# Altium PCB DAQ_Doc.PcbDoc (part 2 of 2)
Units mm, origin at the board's own origin, x right, y up, seen from the top; angles counter-clockwise.
Board outline 100.4 x 106.42 mm, 4 copper layers (Top Layer, Int1 (GND), Int2 (GND), Bottom Layer), stack 1.57 mm thick; 103 components, 79 nets, 453 pads, 246 vias.
Unrouted connection lines stored in the file: 5.
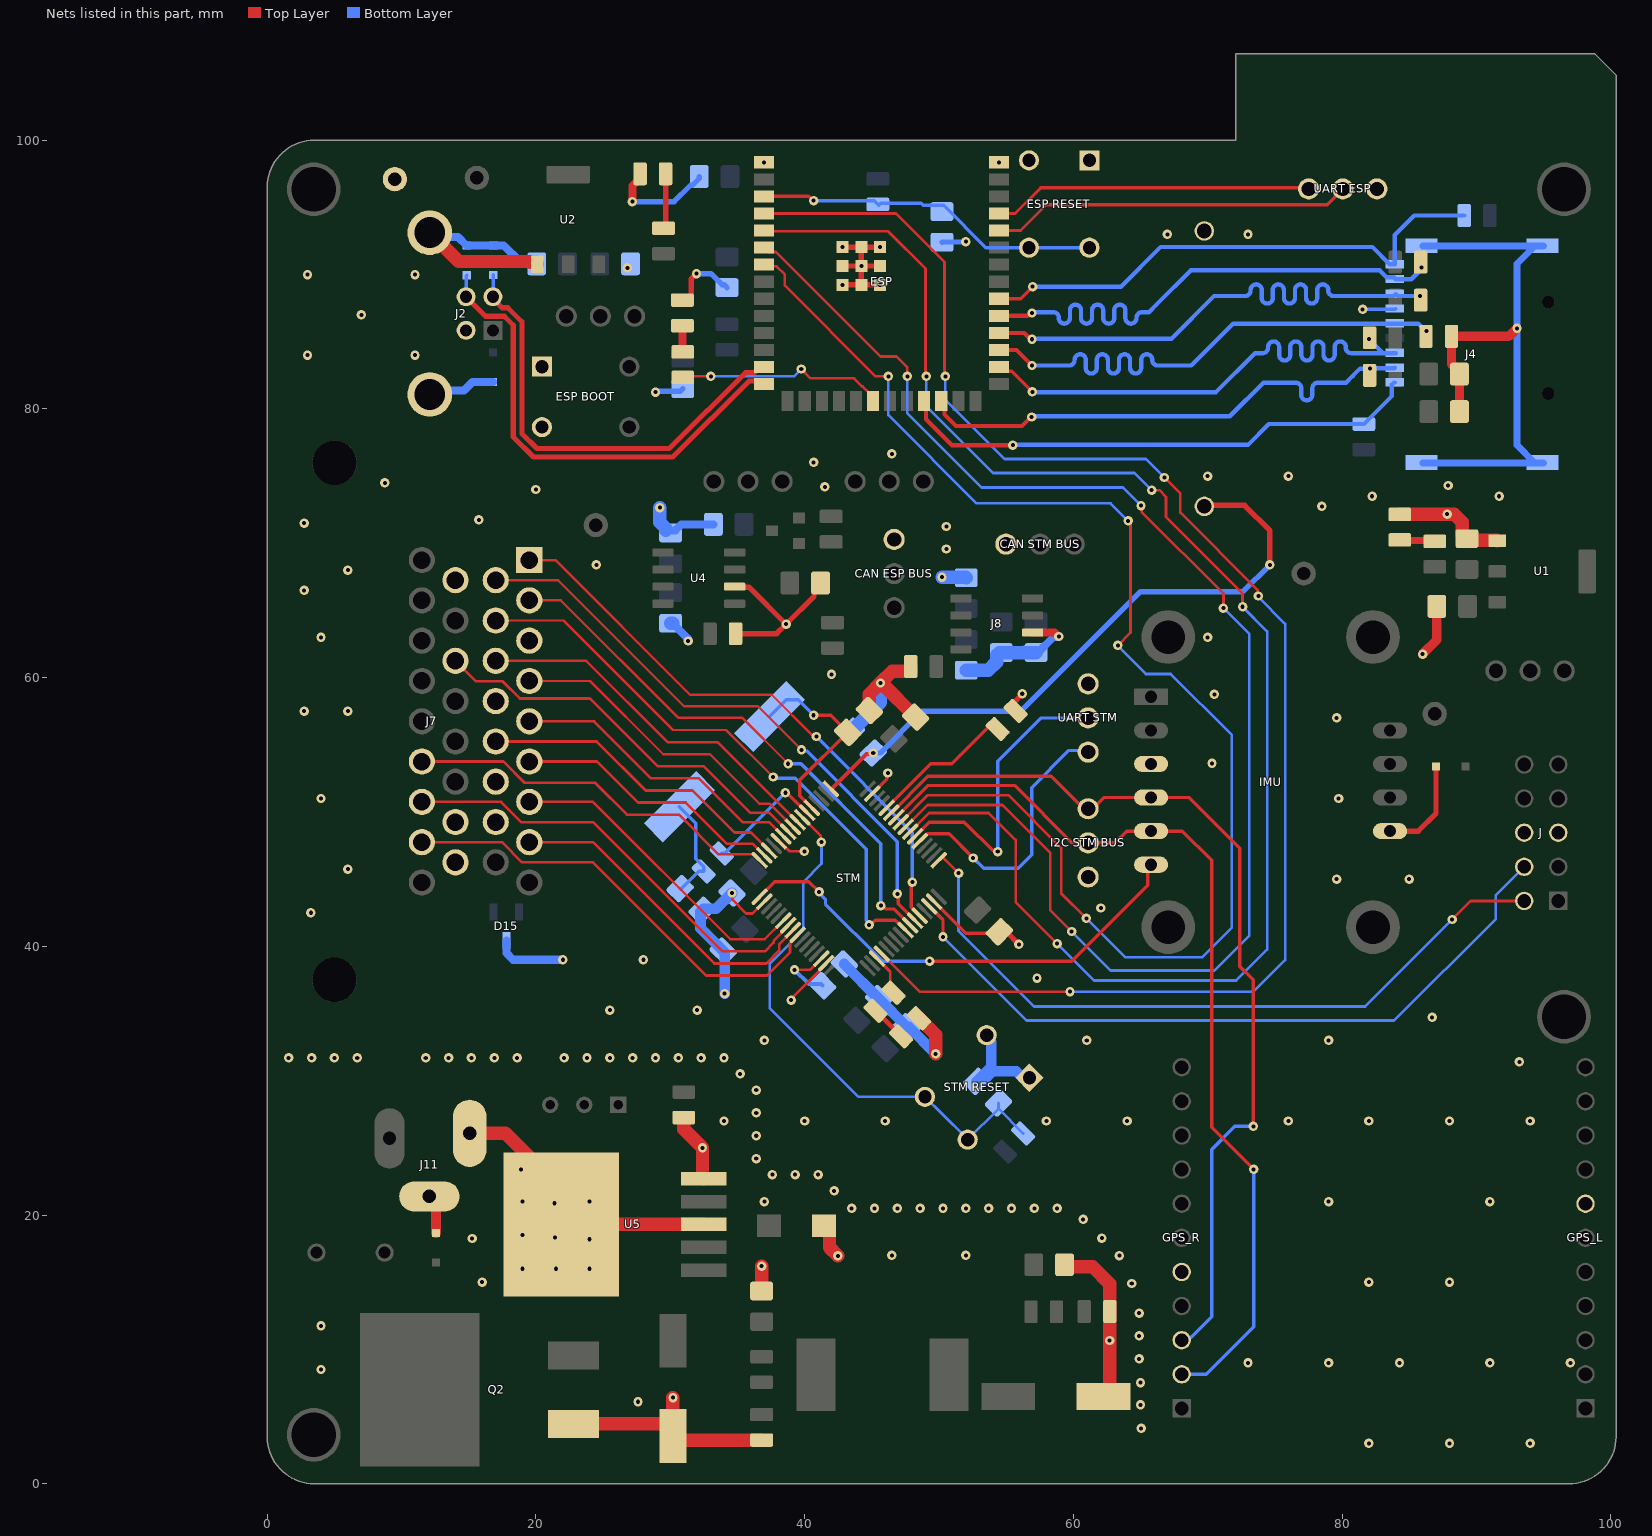
[diagram p4: the nets of this part, all layers, seen from the top]

## Via types
v1: diameter 0.7, hole 0.3, Top Layer to Bottom Layer, 244 vias
v2: diameter 1.27, hole 0.711, Top Layer to Bottom Layer, 2 vias

## Nets (pads, with @x,y where several pads share a name; then routed paths per layer and width w, separated by ;. In a path a pad name is that pad's centre, name@x,y a point inside that pad or via, vN(x,y) a via of type N, cw(c..) or ccw(c..) an arc to the next point about the centre after c; other vN are vias at no path point) (continued)
ESP_Diode_PWR_K: D2.K R2.1 | length 4.1
  Top Layer w0.25: D2.K@29.5,93.45 D2.K@29.65,93.6
  Top Layer w0.4: D2.K@29.65,93.6 R2.1@29.65,97.5
ESP_LED_RES: D8.K R13.1 | length 2
  Top Layer w0.6: R13.1@30.9,86.2 30.913,86.188 30.913,84.263 D8.K@30.925,84.25
ESP_LED_TEST: D8.A ESP.20 | length 15.2
  Top Layer w0.2: D8.A@30.925,82.35 31,82.425 v1(33.025,82.425) ; v1(39.75,82.975) 40.45,82.275 43.677,82.275 44.282,81.669 44.321,81.669 44.81,81.18 ESP.20@45.09,81.18
  Bottom Layer w0.2: v1(33.025,82.425) 39.2,82.425 v1(39.75,82.975)
ESP_RESET: "ESP RESET.3" "ESP RESET.4" C17.1 ESP.3 R8.1 | length 25.9
  Top Layer w0.25: ESP.3@36.975,95.82 40.304,95.82 40.624,95.5 v1(40.675,95.5)
  Bottom Layer w0.25: v1(40.675,95.5) 45.182,95.5 45.525,95.157 45.668,95.3 48.675,95.3 48.818,95.157 50.343,95.157 53.5,92 56.7,92 61.2,92
ESP_UART_RX: "UART ESP.2" ESP.36 | length 27.4
  Top Layer w0.2: ESP.36@53.956,93.28 ESP.36@54.475,93.28 56.08,93.28 58.005,95.205
  Top Layer w0.254: 58.005,95.205 78.89,95.205 80.06,96.375
ESP_UART_TX: "UART ESP.1" ESP.37 | length 24.3
  Top Layer w0.2: ESP.37@54.063,94.55 ESP.37@54.475,94.55 55.675,94.55 57.575,96.45
  Top Layer w0.254: 57.575,96.45 77.445,96.45 77.52,96.375
ESP_USB_D_N: D5.2 ESP.13 J2.2 | length 34
  Top Layer w0.381: J2.2@16.8,88.35 16.8,88.202 17.47,87.532 17.909,87.532 18.95,86.491 18.95,78.175 20.075,77.05 29.917,77.05 32.749,79.882 32.782,79.882 34.754,81.854 35.614,82.714 36.269,82.714 36.675,83.12 ESP.13@36.975,83.12
  Bottom Layer w0.25: J2.2@16.8,88.35 16.813,88.363 16.813,89.962 D5.2@16.825,89.975
ESP_USB_D_P: D6.2 ESP.14 J2.3 | length 36.4
  Top Layer w0.381: J2.3@14.8,88.35 16.253,86.897 17.646,86.897 18.315,86.228 18.315,77.912 19.812,76.415 30.18,76.415 33.012,79.247 33.045,79.247 35.389,81.59 35.877,82.079 36.415,82.079 36.715,81.779 36.715,81.59 ESP.14@36.975,81.85
  Bottom Layer w0.25: J2.3@14.8,88.35 14.825,88.375 14.825,89.925 D6.2@14.85,89.95
GND: "CAN ESP BUS.3" "CAN STM BUS.3" "ESP BOOT.1" "ESP BOOT.2" "ESP RESET.1" "ESP RESET.2" "I2C STM BUS.3" "STM RESET.1" "STM RESET.2" "UART ESP.3" "UART STM.3" C1.1 C2.1 C3.1 C4.1 C6.1 C7.1 C8.1 C9.1 C10.1 C11.1 C12.1 C13.2 C14.2 C15.2 C16.2 C17.2 C18.2 C19.1 C20.1 C21.1 C22.1 C23.1 C24.1 C25.1 C26.1 C27.1 C28.1 C29.1 C30.2 C31.2 C32.1 C33.1 C34.1 COIN.2 D3.1 D4.1 D5.1 D6.1 D9.1 D10.A D11.K D14.K D15.3 ESP.1 ESP.40 ESP.41_1 ESP.41_2 ESP.41_3 ESP.41_4 ESP.41_5 ESP.41_6 ESP.41_7 ESP.41_8 ESP.41_9 GPS_L.07 GPS_R.05 IMU.3 IMU.7 J2.4 J2.S1 J2.S2 J4.P6 J4.SH1 J4.SH2 J4.SH3 J4.SH4 J7.3 J7.13 J7.15 J7.16 J7.18 J7.24 J7.25 J8.2 J11.1 J11.3 J.5 J.6 pad.8 Q2.1 R1.1 R2.2 R3.2 R5.1 R6.1 R13.2 R15.2 R22.1 R23.1 STM.12 STM.18 STM.31 STM.47 STM.63 U1.1 U2.1 U4.2 U5.3 U5.5 U5.6 | length 288.5
  Top Layer w0.2: v1(34.592,43.972) 34.62,43.944 34.62,43.48 35.65,42.45 36.123,42.45 STM.18@37.006,43.333 ; STM.12@38.066,47.83 38.123,47.83 38.878,47.075 v1(39.975,47.075) ; v1(39,36) 39,36.078 41.602,38.68 STM.31@41.602,38.737
  Top Layer w0.25: STM.63@45.038,51.365 46.114,52.441 46.114,52.814 v1(46.2,52.9) ; STM.47@49.634,43.333 51.99,40.977 54.385,40.977 C10.1@54.491,41.084
  Top Layer w0.4: R13.2@30.9,88.1 31.25,88.1 31.55,88.4 31.55,89.669 v1(31.954,90.073) ; U4.2@34.795,66.77 34.825,66.74 35.86,66.74 v1(38.625,63.975) ; R3.2@34.86,63.27 37.92,63.27 v1(38.625,63.975) ; C21.1@41.186,67.05 40.695,66.559 40.695,66.045 v1(38.625,63.975) ; v1(42.825,89.24) ESP.41_5@44.225,89.24 ; ESP.41_2@42.825,90.64 v1(44.225,90.64) ; v1(42.825,92.04) ESP.41_8@44.225,92.04 ; v1(45.625,89.24) ESP.41_5@44.225,89.24 ; ESP.41_3@45.625,90.64 v1(44.225,90.64) ; v1(45.625,92.04) ESP.41_8@44.225,92.04 ; C10.1@54.491,41.084 55.016,41.084 v1(55.95,40.15) ; R5.1@55.713,57.523 55.542,57.694 55.542,58.118 56.2,58.776 v1(56.2,58.8) ; IMU.7@83.575,48.575 85.675,48.575 87,49.9 D3.1@87,53.4 ; ESP.41_5@44.225,89.24 v1(44.225,90.64) ; v1(44.225,90.64) ESP.41_8@44.225,92.04
  Top Layer w0.6: v1(27.175,95.425) 27.175,96.599 27.526,96.95 27.55,96.95 27.75,97.15 R2.2@27.75,97.5 ; J8.2@56.97,63.358 58.596,63.358 58.895,63.059 v1(58.922,63.059)
  Top Layer w0.7: v1(86,61.75) 87.057,62.807 C1.1@87.057,65.3 ; C25.1@88.743,79.8 C24.1@88.743,82.6 88.743,82.75 88.15,83.343 R22.1@88.15,85.4 92.425,85.4 v1(93.025,86)
  Top Layer w0.75: J11.3@12.069,21.381 12.575,20.875 D9.1@12.575,18.675
  Top Layer w1: J2.S1@12.1,93.12 14.245,90.975 19.524,90.975 19.589,90.91 20.075,90.91 20.075,90.79 U2.1@20.11,90.755 ; J11.1@15.069,26.081 17.733,26.081 21.9,21.914 U5.6@21.9,19.3 U5.3@32.5,19.3 ; Q2.1@22.785,4.46 29.325,4.46 C30.2@30.2,3.585 ; v1(30.2,6.4) C30.2@30.2,3.585 ; R23.1@31,27.25 31,26.4 v1(32.4,25) 32.4,22.8 U5.5@32.5,22.7 ; D14.K@36.8,3.25 30.5,3.25 C30.2@30.2,3.55 ; C33.1@36.8,14.343 v1(36.8,16.2) ; D10.A@41.45,19.2 41.5,19.2 41.85,18.85 41.85,17.58 v1(42.47,16.96) ; C15.2@44.818,57.548 44.712,57.654 44.712,57.937 44.818,58.043 44.818,58.768 v1(45.65,59.6) ; R15.2@47.9,60.825 47.9,60.475 46.525,60.475 v1(45.65,59.6) ; C7.1@48.26,57.06 45.72,59.6 v1(45.65,59.6) ; R6.1@48.522,34.647 49.75,33.419 v1(49.75,32) ; C32.1@59.343,16.3 59.493,16.15 61.44,16.15 62.72,14.87 D11.K@62.72,12.82 62.71,12.81 62.71,6.96 C31.2@62.25,6.5 ; R1.1@84.3,72.15 88.367,72.15 88.952,71.564 88.952,70.543 89.152,70.343 C2.1@89.3,70.343 ; C2.1@89.268,70.225 91.52,70.225 U1.1@91.555,70.19 ; C30.2@30.2,3.55 C30.2@30.2,3.585 ; C30.2@30.2,3.55 C30.2@30.2,3.585
  Bottom Layer w0.25: v1@81.5,87.375 v1(81.538,87.412) 83.963,87.412 J4.P6@84,87.45
  Bottom Layer w0.4: v1(27.175,95.425) 30.282,95.425 31.507,96.65 31.657,96.65 32.157,97.15 C13.2@32.157,97.3 ; v1(28.9,81.25) 28.957,81.307 30.732,81.307 C18.2@30.925,81.5 ; v1(31.954,90.073) 33.034,90.073 33.875,89.232 34.025,89.232 C14.2@34.225,89.032 ; C17.2@50.225,92.407 50.247,92.429 51.979,92.429 v1(52,92.45)
  Bottom Layer w0.5: J4.SH3@86,75.98 J4.SH4@94.35,75.98 ; J4.SH2@86,92.13 J4.SH1@94.35,92.13 ; J4.SH4@95,75.98 J4.SH4@94.35,75.98 ; J4.SH1@95,92.13 J4.SH1@94.35,92.13 ; J4.SH4@94.35,75.98 93.025,77.305 v1(93.025,86) 93.025,90.805 J4.SH1@94.35,92.13
  Bottom Layer w0.6: J2.S2@12.1,81.08 12.401,81.381 14.658,81.381 15.277,82 D4.1@16.8,82 ; J2.S1@12.1,93.12 12.419,92.801 14.199,92.801 D6.1@14.85,92.15 14.875,92.175 17.6,92.175 18.808,90.967 19.89,90.967 C4.1@20.057,90.8 ; D15.3@17.8,40.445 17.8,39.5 18.3,39 v1(22,39) ; C27.1@29.675,70.966 30.375,70.966 30.819,71.41 C20.1@33.207,71.41 ; C26.1@30.175,64.044 31.306,62.913 31.306,62.744 v1(31.325,62.725) ; C22.1@57.225,61.87 57.375,61.87 58.545,63.04 58.903,63.04 v1(58.922,63.059)
  Bottom Layer w0.8: C16.2@32.358,42.682 32.252,42.576 32.252,41.341 34.048,39.546 34.048,36.477 v1(34.05,36.475) ; C16.2@32.464,42.788 33.408,42.788 v1(34.592,43.972) ; C12.1@42.958,38.683 42.958,38.671 45.508,36.121 C6.1@45.508,36.108 C11.1@47.608,34.008 47.742,34.008 v1(49.75,32) ; 53.553,33.39 53.553,33.201 53.9,32.854 53.9,31.04 C19.1@52.815,29.955 53.24,29.955 53.984,30.7 55.749,30.7 56.241,30.208 56.735,30.208
  Bottom Layer w1: v1(29.225,72.65) 29.225,71.566 29.675,71.116 C27.1@29.675,70.966 ; C26.1@30.025,64.044 C26.1@30.175,64.044 ; C34.1@43.492,56.008 45.65,58.166 v1(45.65,59.6) ; v1(50.225,67.475) 51.986,67.475 C29.1@52.025,67.436 ; C28.1@52.025,60.55 53.675,60.55 54.285,61.16 54.285,61.66 54.485,61.86 C23.1@54.635,61.86 ; C23.1@54.64,61.865 57.22,61.865 C22.1@57.225,61.87
  other v1: 82,3 88,3 94,3 65.05,4.125 65,5.875 27.6,6.1 65,7.525 4,8.5 73,9 79,9 84.278,9 91,9 97,9 64.9,9.3 62.71,10.66 64.9,11 4,11.75 64.9,12.7 64.35,14.9 16,15 82,15 88,15 19,16 21.5,16 24,16 63.425,16.975 46.5,17 52,17 24,18.196 15.25,18.25 62.125,18.275 21.406,18.313 19,18.5 60.725,19.675 43.5,20.5 45.2,20.5 46.9,20.5 48.6,20.5 50.3,20.5 52,20.5 53.7,20.5 55.4,20.5 57.1,20.5 58.8,20.5 21.376,20.876 19,21 24,21 37,21 79,21 91,21 42.2,21.8 37.6,23 39.3,23 41,23 18.876,23.376 36.4,24.2 36.4,25.9 34,27 40,27 46,27 58,27 64,27 76,27 82,27 88,27 94,27 36.4,27.6 36.4,29.3 35.2,30.5 93.2,31.4 1.6,31.7 3.3,31.7 5,31.7 6.7,31.7 11.8,31.7 13.5,31.7 15.2,31.7 16.9,31.7 18.6,31.7 22.1,31.7 23.8,31.7 25.5,31.7 27.2,31.7 28.9,31.7 30.6,31.7 32.3,31.7 34,31.7 37,33 61,33 79,33 86.709,34.709 25.5,35.25 32,35.25 57.3,37.625 28,39 3.25,42.5 62.05,42.85 79.602,45 85,45 6,45.75 4,51 79.75,51 70.325,53.625 79.602,57 2.75,57.5 6,57.5 70.5,58.75 42,60.25 4,63 70,63 2.75,66.5 6,68 24.5,68.4 50.55,69.575 50.55,71.25 2.75,71.5 15.75,71.75 87.825,72.175 78.5,72.75 82.25,73.5 91.7,73.5 20,74 41.5,74.2 87.9,74.3 8.75,74.5 70,75 76,75 40.675,76.025 46.5,76.65 3,84 11,84 7,87 3,90 11,90 26.8,90.5 67,93 73,93 36.975,98.36 54.475,98.36
HDR_AN1_STMF4: J7.20 STM.10 | length 30
  Top Layer w0.2: J7.20@14.021,61.24 15.54,59.721 17.529,59.721 18.8,58.45 24.025,58.45 29.075,53.4 32.5,53.4 35.95,49.95 37.36,49.95 STM.10@38.773,48.537
HDR_AN2_STMF4: J7.6 STM.15 | length 20.4
  Top Layer w0.2: J7.6@19.51,53.751 24.549,53.751 27.6,50.7 31.15,50.7 34.225,47.625 36.15,47.625 STM.15@37.006,46.769
HDR_AN3_STMF4: J7.31 STM.16 | length 28.2
  Top Layer w0.2: J7.31@11.51,53.751 17.585,53.751 19.161,52.175 24.4,52.175 26.775,49.8 30.65,49.8 33.6,46.85 36.125,46.85 36.143,46.868 36.595,46.416 STM.16@36.652,46.416
HDR_DI2_STMF4: J7.5 STM.11 | length 22.5
  Top Layer w0.2: J7.5@19.51,56.751 24.324,56.751 28.575,52.5 32.125,52.5 35.4,49.225 37.378,49.225 STM.11@38.42,48.183
HDR_DI3_STMF4: J7.14 STM.14 | length 23.7
  Top Layer w0.2: J7.14@17.01,55.251 24.524,55.251 28.175,51.6 31.65,51.6 34.775,48.475 36.007,48.475 STM.14@37.359,47.123
I2C_SCL: "I2C STM BUS.2" GPS_R.02 IMU.5 STM.58 | length 70.4
  Top Layer w0.25: STM.58@46.806,49.598 46.827,49.598 49.205,51.975 55.625,51.975 59.9,47.7 61.1,47.7 63.1,47.7 63.975,48.575 IMU.5@65.795,48.575 68.125,48.575 70.3,46.4 70.3,38.5
  Top Layer w0.254: 70.3,38.5 70.3,26.525 v1(73.425,23.4)
  Bottom Layer w0.254: GPS_R.02@68.068,8.144 69.894,8.144 73.425,11.675 v1(73.425,23.4)
I2C_SDA: "I2C STM BUS.1" GPS_R.03 IMU.4 STM.59 | length 70.3
  Top Layer w0.25: STM.59@46.452,49.951 46.474,49.951 49.172,52.65 58.366,52.65 60.776,50.24 61.1,50.24 61.44,50.24 62.275,51.075 IMU.4@65.795,51.075 68.625,51.075 72.4,47.3 72.4,38.5
  Top Layer w0.254: 72.4,38.5 73.4,37.5 v1(73.4,26.6)
  Bottom Layer w0.254: GPS_R.03@68.068,10.684 68.282,10.898 68.773,10.898 70.3,12.425 70.3,24.875 72.025,26.6 v1(73.4,26.6)
IMU_RST_STMF4: IMU.6 STM.17 | length 36
  Top Layer w0.25: STM.17@36.652,43.686 37.766,44.8 40.325,44.8 v1(41.075,44.05) ; v1(49.3,38.9) 59.9,38.9 65.546,44.546 65.546,45.826 IMU.6@65.795,46.075
  Bottom Layer w0.25: v1(41.075,44.05) 41.075,43.977 41.551,43.501 41.551,43.149 45.8,38.9 v1(49.3,38.9)
NetD7_A: D7.A STM.35 | length 3.1
  Top Layer w0.2: STM.35@45.392,39.09 46.374,38.108 46.374,36.794 D7.A@46.622,36.547
PRES1_STMF4: J7.8 STM.24 | length 24.7
  Top Layer w0.2: J7.8@19.51,47.751 24.249,47.751 33.275,38.725 37.15,38.725 38.1,39.675 38.1,40.128 39.127,41.155 STM.24@39.127,41.211
PRES2_STMF4: J7.33 STM.25 | length 33.8
  Top Layer w0.2: J7.33@11.51,47.751 17.474,47.751 18.975,46.25 24.25,46.25 32.675,37.825 37.2,37.825 38.909,39.534 38.909,40.23 39.48,40.801 STM.25@39.48,40.858
PROX_ICU1_STMF4: J7.11 STM.41 | length 43.5
  Top Layer w0.18: J7.11@17.01,64.251 22.049,64.251 30.2,56.1 34.16,56.1 v1(37.66,52.6)
  Top Layer w0.25: v1(44.8,41.6) 44.922,41.6 45.272,41.95 46.753,41.95 47.492,41.211 STM.41@47.513,41.211
  Bottom Layer w0.25: v1(37.66,52.6) 37.746,52.514 39.296,52.514 44.575,47.235 44.575,41.947 44.8,41.722 v1(44.8,41.6)
PROX_ICU2_STMF4: J7.2 STM.42 | length 41.1
  Top Layer w0.18: J7.2@19.51,65.751 21.849,65.751 30.6,57 35.37,57 v1(38.78,53.59)
  Top Layer w0.25: v1(45.675,43.025) 45.797,43.025 46.04,42.782 46.65,42.782 STM.42@47.867,41.565
  Bottom Layer w0.25: v1(38.78,53.59) 39.73,53.59 45.675,47.645 v1(45.675,43.025)
PROX_ICU3_STMF4: J7.10 STM.43 | length 44.4
  Top Layer w0.18: J7.10@17.01,67.251 21.649,67.251 31.025,57.875 36.525,57.875 v1(39.77,54.63)
  Top Layer w0.25: v1(46.9,43.9) 46.964,43.836 46.964,43.175 STM.43@48.22,41.919
  Bottom Layer w0.25: v1(39.77,54.63) 39.856,54.544 40.146,54.544 46.9,47.79 v1(46.9,43.9)
PROX_ICU4_STMF4: J7.1 STM.44 | length 43.4
  Top Layer w0.18: J7.1@19.51,68.751 21.449,68.751 31.475,58.725 37.55,58.725 40.556,55.719 40.771,55.719 v1(40.87,55.62)
  Top Layer w0.25: v1(48.02,44.78) 47.934,44.694 47.934,42.912 STM.44@48.574,42.272
  Bottom Layer w0.25: v1(40.87,55.62) 48.02,48.47 v1(48.02,44.78)
SD_CardDetection_ESP: ESP.32 J4.P9 R21.1 | length 39.5
  Top Layer w0.25: ESP.32@54.475,88.2 56.075,88.2 v1(56.975,89.1)
  Bottom Layer w0.318: v1(56.975,89.1) 63.548,89.1 66.498,92.05 82.26,92.05 83.535,90.775 J4.P9@83.925,90.775 83.925,92.95 85.375,94.4 R21.1@89.1,94.4
SD_CLK_ESP: ESP.29 J4.P5 R22.2 | length 41.2
  Top Layer w0.318: ESP.29@54.475,84.39 55.766,84.39 v1(56.925,83.231)
  Bottom Layer w0.318: v1(56.925,83.231) 59.525,83.231 59.684,83.231 ccw(c59.684,83.644) 60.096,83.644 60.096,83.654 cw(c60.509,83.654) 60.509,84.067 cw(c60.509,83.654) 60.922,83.654 60.922,83.05 ccw(c61.335,83.05) 61.335,82.637 ccw(c61.335,83.05) 61.748,83.05 61.748,83.654 cw(c62.161,83.654) 62.161,84.067 cw(c62.161,83.654) 62.574,83.654 62.574,83.05 ccw(c62.986,83.05) 62.986,82.637 ccw(c62.986,83.05) 63.399,83.05 63.399,83.654 cw(c63.812,83.654) 63.812,84.067 cw(c63.812,83.654) 64.225,83.654 64.225,83.05 ccw(c64.638,83.05) 64.638,82.637 ccw(c64.638,83.05) 65.051,83.05 65.051,83.654 cw(c65.464,83.654) 65.464,84.067 cw(c65.464,83.654) 65.876,83.654 65.876,83.644 ccw(c66.289,83.644) 66.289,83.231 68.422,83.231 68.781,83.231 71.9,86.35 85.681,86.35 86.231,85.8 v1(86.3,85.8)
SD_CMD_ESP: ESP.28 J4.P3 R20.1 | length 40.4
  Top Layer w0.25: ESP.28@54.475,83.12 54.8,82.795 55.43,82.795 v1(56.95,81.275)
  Bottom Layer w0.318: v1(56.95,81.275) 56.975,81.25 70.625,81.25 73.525,84.15 73.925,84.15 74.084,84.15 ccw(c74.084,84.563) 74.497,84.563 74.497,84.614 cw(c74.91,84.614) 74.91,85.027 cw(c74.91,84.614) 75.322,84.614 75.322,84.018 ccw(c75.735,84.018) 75.735,83.606 ccw(c75.735,84.018) 76.148,84.018 76.148,84.614 cw(c76.561,84.614) 76.561,85.027 cw(c76.561,84.614) 76.974,84.614 76.974,84.018 ccw(c77.387,84.018) 77.387,83.606 ccw(c77.387,84.018) 77.8,84.018 77.8,84.614 cw(c78.212,84.614) 78.212,85.027 cw(c78.212,84.614) 78.625,84.614 78.625,84.018 ccw(c79.038,84.018) 79.038,83.606 ccw(c79.038,84.018) 79.451,84.018 79.451,84.614 cw(c79.864,84.614) 79.864,85.027 cw(c79.864,84.614) 80.277,84.614 80.277,84.563 ccw(c80.689,84.563) 80.689,84.15 81.344,84.15 83.05,84.15 ; v1(82,85.2) 83.05,84.15 ; J4.P3@84,84.15 83.05,84.15
SD_DAT0_ESP: ESP.30 J4.P7 R19.1 | length 40.5
  Top Layer w0.318: ESP.30@54.475,85.66 56.349,85.66 56.822,85.187 v1(56.925,85.187)
  Bottom Layer w0.318: v1@56.925,85.175 56.975,85.225 67.3,85.225 70.475,88.4 72.625,88.4 72.784,88.4 ccw(c72.784,88.813) 73.197,88.813 73.197,88.859 cw(c73.61,88.859) 73.61,89.271 cw(c73.61,88.859) 74.022,88.859 74.022,88.254 ccw(c74.435,88.254) 74.435,87.841 ccw(c74.435,88.254) 74.848,88.254 74.848,88.859 cw(c75.261,88.859) 75.261,89.271 cw(c75.261,88.859) 75.674,88.859 75.674,88.254 ccw(c76.087,88.254) 76.087,87.841 ccw(c76.087,88.254) 76.5,88.254 76.5,88.859 cw(c76.912,88.859) 76.912,89.271 cw(c76.912,88.859) 77.325,88.859 77.325,88.254 ccw(c77.738,88.254) 77.738,87.841 ccw(c77.738,88.254) 78.151,88.254 78.151,88.859 cw(c78.564,88.859) 78.564,89.271 cw(c78.564,88.859) 78.977,88.859 78.977,88.813 ccw(c79.389,88.813) 79.389,88.4 80.725,88.4 83.85,88.4 84,88.55 84.15,88.4 v1(85.8,88.4)
SD_DAT1_ESP: ESP.31 J4.P8 R18.1 | length 40.7
  Top Layer w0.318: ESP.31@54.475,86.93 56.608,86.93 56.822,87.144 v1(56.925,87.144)
  Bottom Layer w0.318: v1@56.925,87.2 57.523,87.2 58.507,87.2 cw(c58.507,86.787) 58.92,86.787 58.92,86.762 ccw(c59.333,86.762) 59.333,86.349 ccw(c59.333,86.762) 59.746,86.762 59.746,87.348 cw(c60.159,87.348) 60.159,87.761 cw(c60.159,87.348) 60.572,87.348 60.572,86.762 ccw(c60.984,86.762) 60.984,86.349 ccw(c60.984,86.762) 61.397,86.762 61.397,87.348 cw(c61.81,87.348) 61.81,87.761 cw(c61.81,87.348) 62.223,87.348 62.223,86.762 ccw(c62.636,86.762) 62.636,86.349 ccw(c62.636,86.762) 63.049,86.762 63.049,87.348 cw(c63.462,87.348) 63.462,87.761 cw(c63.462,87.348) 63.874,87.348 63.874,86.762 ccw(c64.287,86.762) 64.287,86.349 ccw(c64.287,86.762) 64.7,86.762 64.7,86.787 cw(c65.113,86.787) 65.113,87.2 65.625,87.2 66.225,87.8 68.739,90.314 82.809,90.314 83.322,89.801 83.849,89.801 84,89.65 85.15,89.65 v1@85.9,90.4
  other v1: 85.9,90.525
SD_DAT2_ESP: ESP.23 J4.P1 R17.1 | length 39.6
  Top Layer w0.318: ESP.23@48.9,80.6 49.041,80.459 49.041,79.234 50.975,77.3 v1(55.5,77.3)
  Bottom Layer w0.318: v1(55.5,77.3) 55.525,77.325 73,77.325 74.55,78.875 R17.1@81.625,78.875 83.713,80.963 83.713,81.824 83.864,81.975 J4.P1@83.925,81.975
SD_DAT3_ESP: ESP.24 J4.P2 R16.1 | length 38.6
  Top Layer w0.318: ESP.24@50.17,80.6 50.404,80.366 50.404,79.596 51.275,78.725 56.181,78.725 56.856,79.4 v1(56.9,79.4)
  Bottom Layer w0.318: v1(56.9,79.4) 56.95,79.45 71.65,79.45 74.15,81.95 75.567,81.95 76.552,81.95 cw(c76.552,81.537) 76.965,81.537 76.965,81.057 ccw(c77.377,81.057) 77.377,80.644 ccw(c77.377,81.057) 77.79,81.057 77.79,81.537 cw(c78.203,81.537) 78.203,81.95 80.3,81.95 80.791,82.441 81.35,83 v1(82.1,83) ; v1@82.122,83.038 83.888,83.038 J4.P2@83.925,83.075
SPI_CS: ESP.4 STM.36 | length 115.7
  Top Layer w0.2: ESP.4@36.975,94.55 46.8,94.55 50.418,90.932 50.418,82.482 v1(50.475,82.425) ; STM.36@45.745,39.444 48.564,36.625 v1(59.75,36.625) ; v1(66.775,74.9) 67.962,73.713 67.962,72.288 73.715,66.535 73.715,66.135 v1(73.775,66.075)
  Bottom Layer w0.2: v1(50.475,82.425) 50.475,80.675 54.875,76.275 65.4,76.275 v1(66.775,74.9) ; v1(59.75,36.625) 73.425,36.625 75.767,38.967 75.767,64.008 v1@73.737,66.038
SPI_MISO: ESP.6 STM.56 | length 108.3
  Top Layer w0.2: ESP.6@36.975,92.01 37.31,91.675 37.875,91.675 45.65,83.9 46.825,83.9 47.645,83.08 v1(47.645,82.425) ; STM.56@47.513,48.891 49.148,50.525 54.725,50.525 58.275,46.975 58.275,42.7 v1(59.875,41.1) ; v1(65.036,72.807) 65.086,72.756 65.086,72.339 71.175,66.25 v1(71.175,65.175)
  Bottom Layer w0.2: v1(47.645,82.425) 47.645,79.673 53.168,74.15 63.693,74.15 v1(65.036,72.807) ; v1(59.875,41.1) 62.775,38.2 70.5,38.2 73.1,40.8 73.1,63.25 v1(71.175,65.175)
SPI_MOSI: ESP.7 STM.57 | length 105.9
  Top Layer w0.2: ESP.7@36.975,90.74 37.098,90.617 37.908,90.617 38.525,90 38.525,89.19 45.29,82.425 v1(46.23,82.425) ; STM.57@47.16,49.244 49.165,51.25 55.175,51.25 59.1,47.325 59.1,43.95 v1(60.975,42.075) ; v1(63.315,62.408) 64.25,63.343 64.25,71.365 64.075,71.54 v1(64.075,71.675)
  Bottom Layer w0.2: v1(46.23,82.425) 46.23,79.545 52.8,72.975 62.775,72.975 v1(64.075,71.675) ; v1(60.975,42.075) 63.872,39.178 69.578,39.178 71.8,41.4 71.8,55.725 67.25,60.275 65.4,60.275 63.315,62.36 v1(63.315,62.408)
SPI_SCK: ESP.5 STM.55 | length 116.9
  Top Layer w0.2: ESP.5@36.975,93.28 37.028,93.227 46.223,93.227 49.003,90.447 49.003,82.482 v1(49.06,82.425) ; STM.55@47.867,48.537 49.255,49.925 53.7,49.925 55.709,47.916 55.709,43.291 v1(58.8,40.2) ; v1(65.825,73.95) 66.4,73.95 66.9,73.45 66.9,71.95 72.6,66.25 v1(72.6,65.275)
  Bottom Layer w0.2: v1(49.06,82.425) 49.06,80.19 54.025,75.225 64.55,75.225 v1(65.825,73.95) ; v1(58.8,40.2) 61.55,37.45 72.125,37.45 74.425,39.75 74.425,63.45 v1(72.6,65.275)
STM32F4_BOOT0: R5.2 STM.60 | length 10.8
  Top Layer w0.25: STM.60@46.099,50.305 49.383,53.589 50.965,53.589 53.715,56.339 54.21,56.339 R5.2@54.369,56.179
STM32F4_Diode_PWR_K: D1.K R1.2 | length 2.6
  Top Layer w0.5: R1.2@84.3,70.25 84.35,70.2 86.85,70.2 D1.K@86.9,70.15
STM32F4_LED_RES: D7.K R6.2 | length 2.7
  Top Layer w0.35: D7.K@45.278,35.203 R6.2@47.178,33.303
STM32F4_NRST: "STM RESET.3" "STM RESET.4" C19.2 R10.1 STM.7 | length 41.4
  Top Layer w0.2: STM.7@39.834,49.598 41.206,48.225 41.206,47.794 v1(41.25,47.75)
  Bottom Layer w0.2: v1(41.25,47.75) 41.25,46.15 39.9,44.8 39.9,41.2 37.4,38.7 37.4,35.4 44.006,28.794 48.957,28.794 50.25,27.5 51.921,25.829 52.139,25.612 C19.2@54.432,27.905 ; C19.2@54.432,28.339 54.432,27.912 R10.1@56.272,26.072
STM32F4_OSC_IN: C15.1 STM.5 Y1.2 | length 14.8
  Top Layer w0.25: STM.5@40.541,50.305 40.541,50.326 39.65,51.217 39.65,52.38 C15.1@43.202,55.932 41.934,57.2 v1(40.67,57.2)
  Bottom Layer w0.25: Y1.2@37.398,57.108 38.635,58.345 39.525,58.345 v1(40.67,57.2)
STM32F4_OSC_OUT: R9.1 STM.6 | length 8.8
  Top Layer w0.25: v1(38.57,51.43) 38.688,51.43 40.166,49.951 STM.6@40.188,49.951
  Bottom Layer w0.25: R9.1@33.832,46.922 34.062,46.922 v1(38.57,51.43)
STM32F4_SWCLK: J.2 STM.49 | length 54
  Top Layer w0.2: STM.49@49.988,46.416 50.208,46.636 50.264,46.636 50.484,46.416 v1(51.458,45.442) ; v1(88.196,41.996) 89.58,43.38 J.2@93.56,43.38
  Bottom Layer w0.2: v1(51.458,45.442) 51.458,41.142 57.075,35.525 81.725,35.525 v1(88.196,41.996)
STM32F4_SWDIO: J.4 STM.46 | length 54.3
  Top Layer w0.25: STM.46@49.281,42.979 50.3,41.96 v1(50.3,40.7)
  Bottom Layer w0.2: v1(50.3,40.7) 56.525,34.475 83.875,34.475 91.45,42.05 91.45,43.81 J.4@93.56,45.92
STM32F4_VCAP: C12.2 STM.30 | length 4.9
  Top Layer w0.2: v1(39.25,38.25) 40.408,38.25 STM.30@41.248,39.09
  Bottom Layer w0.3: v1(39.25,38.25) 40.318,37.182 41.226,37.182 C12.2@41.342,37.067
STM32F4_VCOIN: C34.2 COIN.1 STM.1 | length 47.3
  Top Layer w0.3: STM.1@41.994,51.694 44.615,54.315 45.032,54.315 v1(45.108,54.392)
  Top Layer w0.4: COIN.1@70.25,72.825 72.75,72.825 74.625,70.95 v1(74.625,68.4)
  Bottom Layer w0.4: v1(45.108,54.392) 45.639,54.392 48.747,57.5 56.1,57.5 65,66.4 72.625,66.4 v1(74.625,68.4)
STMF4_UART2_RX: "UART STM.2" STM.54 | length 22.3
  Top Layer w0.25: STM.54@48.22,48.183 48.241,48.183 49.283,49.225 51.875,49.225 52,49.1 52.025,49.1 53.989,47.136 54.289,47.136 v1(54.375,47.05)
  Bottom Layer w0.25: v1(54.375,47.05) 54.375,53.775 57.6,57 61.1,57
STMF4_UART2_TX: "UART STM.1" STM.53 | length 20.4
  Top Layer w0.25: STM.53@48.574,47.83 48.595,47.83 49.14,48.375 50.75,48.375 v1(52.55,46.575)
  Bottom Layer w0.25: v1(52.55,46.575) 53.325,45.8 55.9,45.8 56.9,46.8 56.9,51.8 59.677,54.577 60.983,54.577 61.1,54.46
SUS1_STMF4: J7.12 STM.8 | length 27.4
  Top Layer w0.18: J7.12@17.01,61.251 23.749,61.251 29.8,55.2 33.525,55.2 STM.8@39.48,49.244
SUS2_STMF4: J7.4 STM.9 | length 24.1
  Top Layer w0.18: J7.4@19.51,59.751 24.024,59.751 29.475,54.3 32.95,54.3 36.625,50.625 37.392,50.625 STM.9@39.125,48.893
SUS3_STMF4: J7.7 STM.22 | length 23.7
  Top Layer w0.18: J7.7@19.51,50.751 24.249,50.751 34.475,40.525 37.026,40.525 STM.22@38.42,41.919
SUS4_STMF4: J7.32 STM.23 | length 32.8
  Top Layer w0.2: J7.32@11.51,50.751 17.399,50.751 18.925,49.225 24.275,49.225 33.875,39.625 37.05,39.625 37.697,40.272 37.697,40.408 38.252,40.963 38.252,40.987 38.773,41.508 STM.23@38.773,41.565
XTAL_OUT: C16.1 R9.2 Y1.1 | length 7.8
  Bottom Layer w0.25: Y1.1@30.68,50.39 31.9,49.17 31.9,46.503 32.488,45.914 R9.2@32.488,45.578 32.114,45.578 30.834,44.298 C16.1@30.742,44.298
pads on no net: ESP.8 ESP.9 ESP.10 ESP.11 ESP.12 ESP.15 ESP.17 ESP.18 ESP.19 ESP.25 ESP.26 ESP.33 ESP.34 ESP.35 ESP.38 ESP.39 GPS_L.01 GPS_L.02 GPS_L.03 GPS_L.04 GPS_L.06 GPS_L.08 GPS_L.09 GPS_L.10 GPS_L.11 GPS_R.01 GPS_R.06 GPS_R.07 GPS_R.08 GPS_R.09 GPS_R.10 GPS_R.11 IMU.1 IMU.8 IMU.9 IMU.10 IMU.11 IMU.12 IMU.13 IMU.14 J4. J7. J7.19 J7.26 J7.27 J8.5 J.1 J.3 J.7 J.8 STM.2 STM.3 STM.4 STM.20 STM.21 STM.26 STM.27 STM.28 STM.29 STM.33 STM.34 STM.37 STM.38 STM.39 STM.40 STM.45 STM.50 STM.51 STM.52 U4.5

## Polygon pours and split planes (outlines as drawn)
+3V3_ESP on Bottom Layer "NONET_L01_P-001" (solid, pour order 33): 90.501,97.899 93.5,94.9 93.5,93.3 93.155,92.955 90.501,92.955
+5V_Buck on Bottom Layer "+5V_BUCK_L04_P024" (solid, pour order 24): 8.59,64.08 8.6,64.07 11.96,64.07 12.71,63.32 12.71,59.82 13.09,59.44 14.74,59.44 15.21,58.97 15.21,51.46 14.7,50.95 13.33,50.95 12.77,51.51 12.8,51.54 12.8,55.24 12.44,55.6 8.57,55.6
+5V_ESP_HDR on Bottom Layer "NONET_L01_P-001" (solid, pour order 4): 15.9,86.8 15.9,83.6 18,83.6 18,85 23.4,85 23.4,88 18.8,88 18.8,86.8
+3V3_ESP on Top Layer "NONET_L01_P-001" (solid, pour order 30): 25.775,98.25 25.775,92.347 19.1,92.347 19.1,98.25
GND on Top Layer "NONET_L01_P-001" (solid, pour order 34): 42.4,92.8 42.2,92.6 42.2,88.7 42.4,88.5 46,88.5 46.3,88.8 46.3,92.6 46.1,92.8
DC_Fuse_+12V on Top Layer "NONET_L01_P-001" (solid, pour order 31): 7.7,17.8 8.2,18.3 9.4,18.3 9.8,17.9 9.8,17.2 10.1,16.9 13.025,16.9 13.2,16.725 13.2,14.2 14.4,13 16,13 16,1.2 15.8,1 6.6,1 6.4,1.2 6.4,13.1 7.2,13.1 7.7,13.6
+5V_Buck on Top Layer "+5V_BUCK_L01_P023" (solid, pour order 23): 49.2,5.3 49.3,5.4 57.2,5.4 57.2,11.4 57.5,11.7 57.5,15.1 57.9,15.5 57.9,17.3 56.2,17.3 52.3,13.4 52.3,10.9 49.3,10.9 49.2,10.8
+12V on Top Layer "+12V_L01_P018" (solid, pour order 18): 20.8,10.7 28.3,10.7 29,11.4 29,12.9 30.3,12.9 30.7,13.3 30.7,16.5 34.3,16.5 34.3,12.9 37.8,12.9 37.8,9.9 37.8,8.8 31.6,8.8 31.2,8.4 20.8,8.4
+3V3_STM32F4 on Top Layer "NONET_L01_P-001" (solid, pour order 2): 92.9,71.2 99,71.2 99,64.6 95.8,64.6 95.8,67.2 85.8,67.2 85.8,69.1 92.9,69.1
+5V_STMF4 on Top Layer "NONET_L01_P-001" (solid, pour order 1): 88.3,66.4 95.1,66.4 95.1,59.3 92.9,59.3 92.9,62.1 91.4,63.6 88.3,63.6
+5V_STMF4_HDR on Top Layer "NONET_L01_P-001" (solid, pour order 0): 97.5,52.6 92.4,52.6 92.4,54.1 95.5,57.2 95.5,61.5 97.5,61.5
GND on Int2 (GND) (split plane): 99.89,104.639 99.89,96.5 99.89,3.5 99.891,3.484 99.883,3.265 99.855,3.032 99.809,2.802 99.745,2.575 99.664,2.355 99.566,2.142 99.451,1.937 99.32,1.741 99.175,1.557 99.015,1.385 98.843,1.225 98.659,1.08 98.463,0.949 98.258,0.834 98.045,0.736 97.825,0.655 97.598,0.591 97.368,0.545 97.135,0.517 96.916,0.509 96.9,0.51 3.5,0.51 3.484,0.509 3.265,0.517 3.032,0.545 2.802,0.591 2.575,0.655 2.355,0.736 2.142,0.834 1.937,0.949 1.741,1.08 1.557,1.225 1.385,1.385 1.225,1.557 1.08,1.741 0.949,1.937 0.834,2.142 0.736,2.355 0.655,2.575 0.591,2.802 0.545,3.032 0.517,3.265 0.509,3.484 0.51,3.5 0.51,96.5 0.509,96.516 0.517,96.735 0.545,96.968 0.591,97.198 0.655,97.424 0.736,97.645 0.834,97.858 0.949,98.063 1.08,98.259 1.225,98.443 1.384,98.615 1.557,98.775 1.741,98.92 1.937,99.051 2.142,99.166 2.355,99.264 2.575,99.345 2.802,99.409 3.032,99.455 3.265,99.483 3.484,99.491 3.5,99.49 72.075,99.49 72.175,99.499 72.27,99.528 72.359,99.576 72.436,99.639 72.499,99.716 72.547,99.805 72.576,99.9 72.585,100 72.585,105.915 98.614,105.915
GND on Int1 (GND) (split plane): 99.89,104.639 99.89,96.5 99.89,3.5 99.891,3.484 99.883,3.265 99.855,3.032 99.809,2.802 99.745,2.575 99.664,2.355 99.566,2.142 99.451,1.937 99.32,1.741 99.175,1.557 99.015,1.385 98.843,1.225 98.659,1.08 98.463,0.949 98.258,0.834 98.045,0.736 97.825,0.655 97.598,0.591 97.368,0.545 97.135,0.517 96.916,0.509 96.9,0.51 3.5,0.51 3.484,0.509 3.265,0.517 3.032,0.545 2.802,0.591 2.575,0.655 2.355,0.736 2.142,0.834 1.937,0.949 1.741,1.08 1.557,1.225 1.385,1.385 1.225,1.557 1.08,1.741 0.949,1.937 0.834,2.142 0.736,2.355 0.655,2.575 0.591,2.802 0.545,3.032 0.517,3.265 0.509,3.484 0.51,3.5 0.51,96.5 0.509,96.516 0.517,96.735 0.545,96.968 0.591,97.198 0.655,97.424 0.736,97.645 0.834,97.858 0.949,98.063 1.08,98.259 1.225,98.443 1.384,98.615 1.557,98.775 1.741,98.92 1.937,99.051 2.142,99.166 2.355,99.264 2.575,99.345 2.802,99.409 3.032,99.455 3.265,99.483 3.484,99.491 3.5,99.49 72.075,99.49 72.175,99.499 72.27,99.528 72.359,99.576 72.436,99.639 72.499,99.716 72.547,99.805 72.576,99.9 72.585,100 72.585,105.915 98.614,105.915

## Silkscreen, mask and mechanical layers (free items; w line width, h text height)
Top Overlay:
  drawing of 102 lines, arcs and shapes, not listed
  text "Put the screwdriver down and walk away slowly" at 73.25,100.85 h1.1
  text "!" at 97.05,99.875 h2.2
  text "3V3 ESP" at 13.4,98.418 h1.3
  text "GND" at 8,98.318 h1.3
  text "Test" at 8.7,95.412 h1
  text "Test" at 14.8,95.312 h1
  text "GND" at 81.1,94.013 h1.2
  text "TX" at 76.5,94 h1.2
  text "RX" at 79,94 h1.2
  text "HDR" at 20.8,88.5 h1.2
  text "BUCK" at 25.5,88.513 h1.2
  text "3V3" at 42.9,77.113 h1.2
  text "5V" at 48.3,77.113 h1.2
  text "3V3TR" at 31.8,76.213 h1.2
  text "PWR" at 42.7,76.217 h1.2
  text "PWR" at 47.7,76.217 h1.2
  text "5VTR" at 36.75,76.188 h1.2
  text "5V ESP" at 24.013,73.713 h1.3 r315
  text "CAN ESP LOGIC" at 28.925,72.263 h1.2
  text "GND" at 48.288,72.15 h1.2 r270
  text "CANH" at 58.775,71.588 h1.2
  text "GND" at 53,71.563 h1.2
  text "CANL" at 55.725,71.563 h1.2
  text "Test" at 23.6,69.612 h1
  text "CANL" at 48.288,69.45 h1.2 r270
  text "3V3 STM" at 74.8,69.018 h1.3
  text "CANH" at 48.288,66.425 h1.2 r270
  text "Test" at 76.475,66.037 h1
  text "BUCK" at 89.7,62.113 h1.2
  text "HDR" at 95.1,62.1 h1.2
  text "GND" at 62.713,61.2 h1.2 r270
  text "RX" at 62.7,58.2 h1.2 r270
  text "5V STM" at 84.387,56.513 h1.3 r45
  text "3V3 STM" at 67.8,55.717 h1.5
  text "TX" at 62.7,55.5 h1.2 r270
  text "Test" at 85.8,55.512 h1
  text "GND" at 67.8,53.117 h1.5
  text "SDA" at 62.713,51.8 h1.2 r270
  text "I2C SDA" at 67.75,50.617 h1.5
  text "SCL" at 62.713,49.1 h1.2 r270
  text "I2C SCL" at 67.75,48.117 h1.5
  text "GND" at 77.85,48.092 h1.5
  text "GND" at 62.713,46.5 h1.2 r270
  text "RST STM" at 67.75,45.617 h1.5
  text "DAT" at 23.3,43.2 h6
  text "GPS" at 80.325,33.167 h3
  text "GND" at 93.025,20.417 h1.5
  text "3V3 STM" at 90.45,15.342 h1.5
  text "GND" at 69.4,15.292 h1.5
  text "3V3 STM" at 69.4,12.792 h1.5
  text "I2C SDA" at 69.4,10.192 h1.5
  text "I2C SCL" at 69.4,7.692 h1.5
Bottom Overlay:
  drawing of 98 lines, arcs and shapes, not listed
  text "what did you expect to find here? ;)" at 75.95,104.925 h1.1 r180
  text "Please do not lick the PCB" at 55.3,85.25 h1.1
  text "5V" at 92.875,53.214 h1.3
  text "5V" at 98.7,53.214 h1.3
  text "GND" at 92.9,48.014 h1.3
  text "GND" at 100,48.014 h1.3
  text "SWDIO" at 92.9,45.514 h1.3
  text "SWCLK" at 92.9,43.014 h1.3
  text "DAT" at 95.2,14.6 h12
  text "Belal Hassan (Elfresh)" at 45.598,13.128 h3.3
  text "Youssef Eladawy (3dwy)" at 45.65,10.823 h3.3
  text "ASU Racing Team 26" at 45.7,0.9 h3
Mechanical 1:
  lines w1: 0,3.5 ccw(c3.5,3.5) 3.5,0 96.9,0 ccw(c96.9,3.5) 100.4,3.5 100.4,96.5 100.4,104.85 98.825,106.425 72.075,106.425 72.075,100 52,100 48.3,100 31.6,100 3.5,100 ccw(c3.5,96.5) 0,96.5 0,3.5

## Text inside footprints (layer, text, board x,y; h text height)
COIN: Mechanical 5 "+" at 70.25,70.87 h1.02 r90; Mechanical 5 "-" at 70.2,94.453 h1.02 r90; Top Overlay "+" at 70.25,70.87 h1.02 r90; Top Overlay "-" at 70.2,94.453 h1.02 r90
D1: Mechanical 13 "+" at 87.9,67.433 h1 r270
D2: Mechanical 13 "+" at 29.05,90.508 h1 r270
D7: Mechanical 13 "+" at 46.492,37.832 h1 r45
D8: Mechanical 13 "+" at 31.925,81.533 h1 r270
D11: Mechanical 13 "+" at 60.003,11.82 h1 r180
D14: Mechanical 13 "+" at 35.8,5.967 h1 r90